# EAGLE board SD_Sniffer-Panel-v22 (EAGLE 6.5.0)
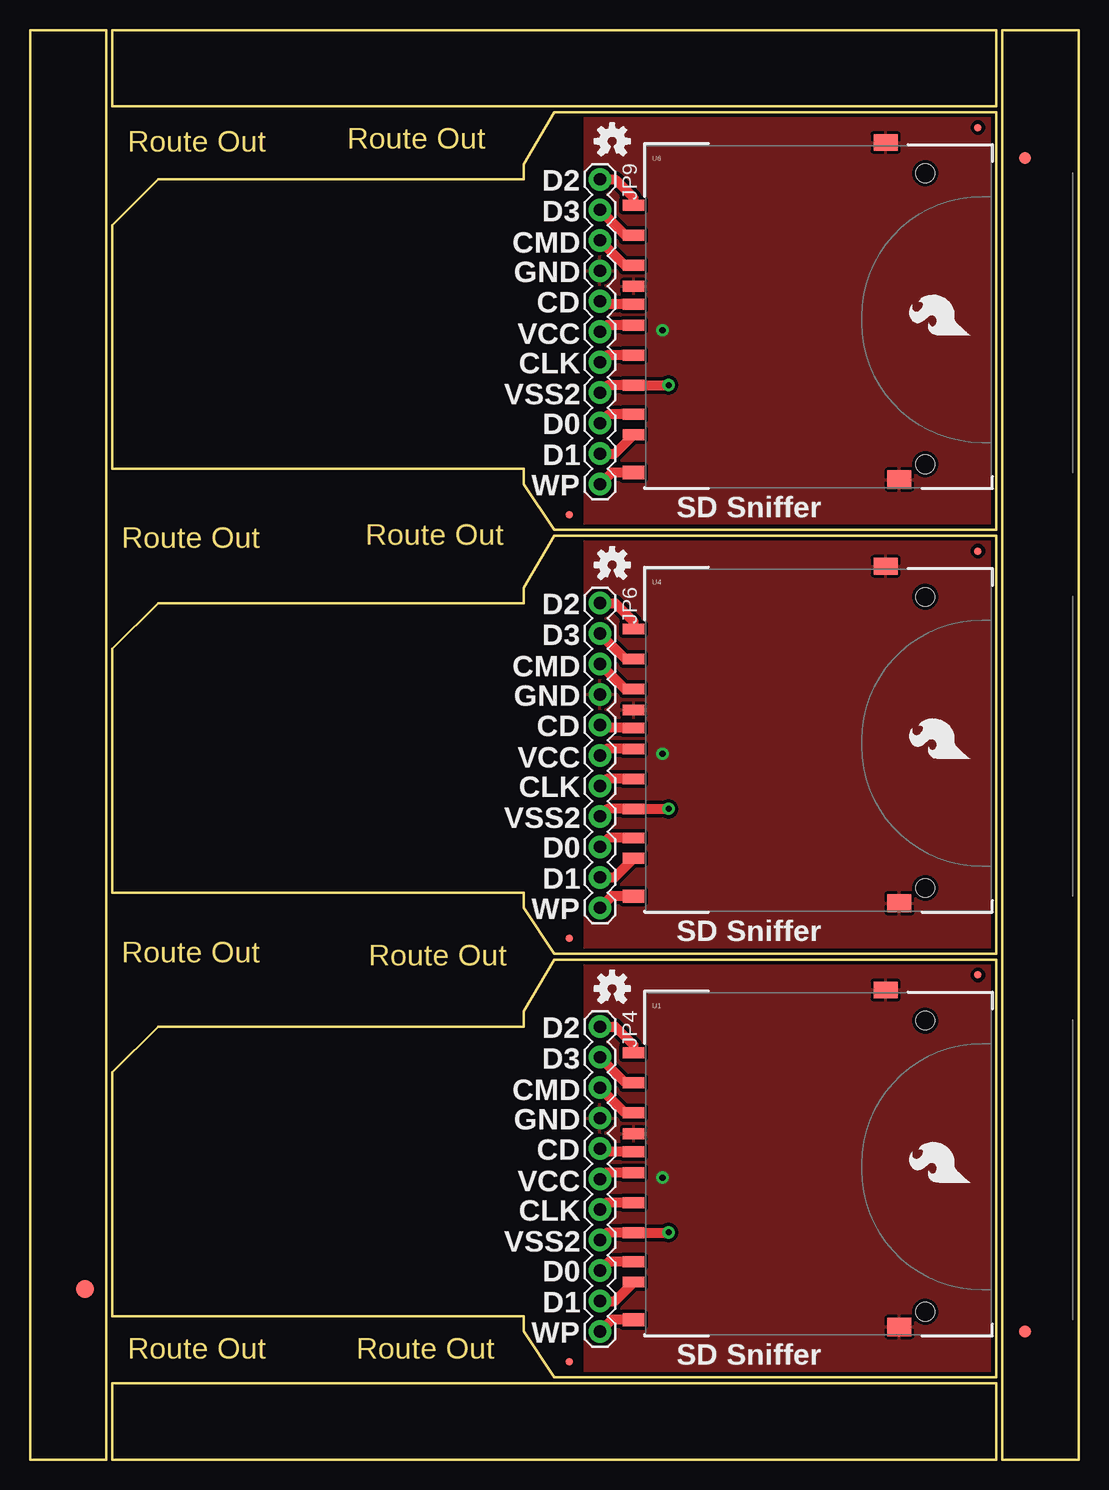
[diagram p0: board, top side]
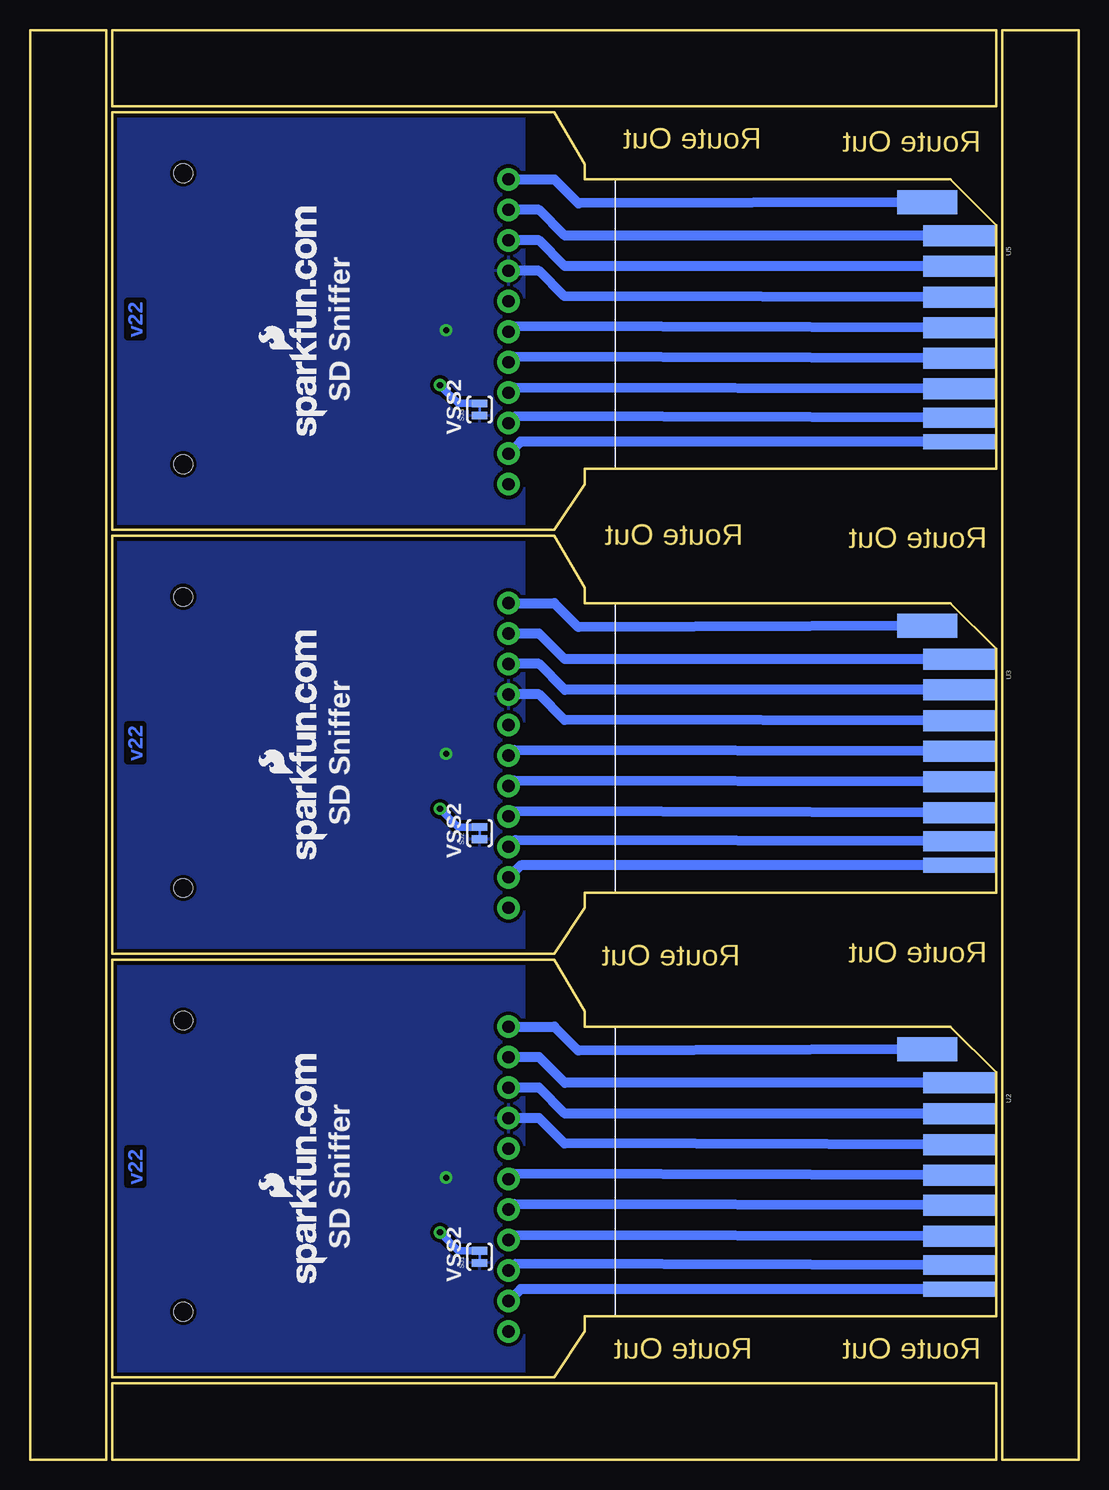
[diagram p1: board, bottom side, seen from below]

Size 87.38 x 119.13 mm. Coordinates in mm from the lower left corner, seen from the top.
Outline: 8.13,6.35 80.52,6.35 80.52,0 57.66,0
Outline: 8.13,119.13 80.52,119.13 80.52,112.78 57.66,112.78
Outline: 79.5,112.78 6.86,112.78 6.86,119.13 29.97,119.13
Outline: 79.25,0 6.86,0 6.86,6.35 29.72,6.35
Outline: 80.52,6.86 80.52,41.66 43.69,41.66 41.15,37.34 41.15,36.07 10.67,36.07 6.86,32.26 6.86,11.94 41.15,11.94 41.15,10.67 43.69,6.86 80.52,6.86
Outline: 80.52,42.16 80.52,76.96 43.69,76.96 41.15,72.64 41.15,71.37 10.67,71.37 6.86,67.56 6.86,47.24 41.15,47.24 41.15,45.97 43.69,42.16 80.52,42.16
Outline: 80.52,77.47 80.52,112.27 43.69,112.27 41.15,107.95 41.15,106.68 10.67,106.68 6.86,102.87 6.86,82.55 41.15,82.55 41.15,81.28 43.69,77.47 80.52,77.47
Outline: 87.38,0 87.38,119.13 81.03,119.13 81.03,0 87.38,0
Outline: 6.35,0 6.35,119.13 0,119.13 0,0 6.35,0
Copper layers (1*16): Top 0.035mm / dielectric 1.5mm / Bottom 0.035mm
Design rules "SparkFun-2-layer": minimum track width 7mil, minimum drill 15mil, track to track 8mil, track to pad 8mil, pad to pad 8mil, via to via 8mil, smd to smd 8mil, copper to edge 8mil, drill to drill 8mil, minimum pad ring 12mil, minimum via ring 10mil, stop-mask expansion 4mil, vias tented up to drill 20mil, thermal gap 10mil

## Footprints (pad centres in the part's own frame; a part is rotated, then mirrored left to right if it is on the bottom)
FIDUCIAL-1.5X3 = smd 1.5 x 1.5: 1 0,0
FIDUCIAL-1X2 = smd 1 x 1: 1 0,0
MICRO-FIDUCIAL = smd 0.635 x 0.635: 1 0,0
1X11 = drill 1.016 pad 1.88: 1 0,0; 2 2.54,0; 3 5.08,0; 4 7.62,0; 5 10.16,0; 6 12.7,0; 7 15.24,0; 8 17.78,0; 9 20.32,0; 10 22.86,0; 11 25.4,0
SJ_2S-TRACE = smd 0.635 x 1.27: 1 -0.508,0; 2 0.508,0
SD_1:1 = smd 1.8 x 0.9: 1 -1,6.77; 2 -1,4.27; 3 -1,2.52; 4 -1,-0.73; 5 -1,-3.23; 6 -1,-5.73; 7 -1,-8.15; 8 -1,-9.85; 9 -1,9.27; CD -1,1.02 | smd 2 x 1.4: SH@1 20,14.496 | smd 2 x 1.527: SH@2 21.15,-13.589 | smd 1.8 x 1.1: WP -1,-13 | hole 1.55: 23.3,11.94; 23.3,-12.32
SD-MMC-CARD = smd 1.75 x 6: 1 -6.745,14.713; 2 -4.195,14.703; 3 -1.6,14.703; 4 0.93,14.703; 5 3.465,14.703; 6 6.03,14.703 | smd 1.65 x 6: 7 8.43,14.703 | smd 1.25 x 6: 8 10.43,14.703 | smd 2 x 5: 9 -9.53,12.03

## Placement (x,y rotation side)
E$1  [FIDUCIAL-1.5X3]  4.57,14.22 0 top
E$2  [FIDUCIAL-1X2]  82.93,10.67 0 top
E$3  [FIDUCIAL-1X2]  82.93,108.46 180 top
JP1  FIDUCIALUFIDUCIAL  [MICRO-FIDUCIAL]  78.99,75.69 0 top
JP2  FIDUCIALUFIDUCIAL  [MICRO-FIDUCIAL]  78.99,40.39 0 top
JP3  FIDUCIALUFIDUCIAL  [MICRO-FIDUCIAL]  44.96,8.13 0 top
JP4  M11PTH  [1X11]  47.5,36.07 270 top
JP5  FIDUCIALUFIDUCIAL  [MICRO-FIDUCIAL]  44.96,43.43 0 top
JP6  M11PTH  [1X11]  47.5,71.37 270 top
JP7  FIDUCIALUFIDUCIAL  [MICRO-FIDUCIAL]  78.99,111 0 top
JP8  FIDUCIALUFIDUCIAL  [MICRO-FIDUCIAL]  44.96,78.74 0 top
JP9  M11PTH  [1X11]  47.5,106.68 270 top
LOGO  LOGO-SFENEW  [SFE-NEW-WEBLOGO]  62.61,14.73 90 bottom
LOGO1  LOGO-SFENEW  [SFE-NEW-WEBLOGO]  62.61,50.04 90 bottom
LOGO2  LOGO-SFENEW  [SFE-NEW-WEBLOGO]  62.61,85.34 90 bottom
SJ1  SOLDERJUMPERTRACE  [SJ_2S-TRACE]  49.91,16.89 90 bottom
SJ2  SOLDERJUMPERTRACE  [SJ_2S-TRACE]  49.91,52.2 90 bottom
SJ3  SOLDERJUMPERTRACE  [SJ_2S-TRACE]  49.91,87.5 90 bottom
U1  SD_CARD_SOCKET  [SD_1:1]  51.31,24.64 0 top
U2  SD_MMC_CARDSD_PCB  [SD-MMC-CARD]  24.64,24.64 270 bottom
U3  SD_MMC_CARDSD_PCB  [SD-MMC-CARD]  24.64,59.94 270 bottom
U4  SD_CARD_SOCKET  [SD_1:1]  51.31,59.94 0 top
U5  SD_MMC_CARDSD_PCB  [SD-MMC-CARD]  24.64,95.25 270 bottom
U6  SD_CARD_SOCKET  [SD_1:1]  51.31,95.25 0 top
U$1  SFE_LOGO_FLAME.2_INCH  [SFE_LOGO_FLAME_.2]  78.61,58.04 90 top
U$2  OSHW-LOGOS  [OSHW-LOGO-S]  48.51,39.24 0 top
U$3  OSHW-LOGOS  [OSHW-LOGO-S]  48.51,74.55 0 top
U$4  SFE_LOGO_FLAME.2_INCH  [SFE_LOGO_FLAME_.2]  78.61,22.73 90 top
U$5  SFE_LOGO_FLAME.2_INCH  [SFE_LOGO_FLAME_.2]  78.61,93.34 90 top
U$6  OSHW-LOGOS  [OSHW-LOGO-S]  48.51,109.86 0 top

## Library data of the parts
E$1 = SparkFun-Retired
E$2 E$3 U$1-U$6 = SparkFun-Aesthetics
JP1-JP3 JP5 JP7 JP8 LOGO LOGO1 LOGO2 = SparkFun
JP4 JP6 JP9 U1 U4 U6 = SparkFun-Connectors
SJ1-SJ3 = SparkFun-Passives
U2 U3 U5 = SparkFun-Boards

## Nets
CD: JP4.5 U1.CD
CD1: JP6.5 U4.CD
CD2: JP9.5 U6.CD
CLK: JP4.7 U1.5 U2.5
CLK1: JP6.7 U3.5 U4.5
CLK2: JP9.7 U5.5 U6.5
CMD: JP4.3 U1.2 U2.2
CMD1: JP6.3 U3.2 U4.2
CMD2: JP9.3 U5.2 U6.2
D0: JP4.9 U1.7 U2.7
D1: JP4.10 U1.8 U2.8
D2: JP4.1 U1.9 U2.9
D3: JP4.2 U1.1 U2.1
D4: JP6.1 U3.9 U4.9
D5: JP6.9 U3.7 U4.7
D6: JP6.10 U3.8 U4.8
D7: JP6.2 U3.1 U4.1
D8: JP9.1 U5.9 U6.9
D9: JP9.9 U5.7 U6.7
D10: JP9.10 U5.8 U6.8
D11: JP9.2 U5.1 U6.1
GND: JP4.4 SJ1.1 U1.3 U1.SH@1 U1.SH@2 U2.3
GND1: JP6.4 SJ2.1 U3.3 U4.3 U4.SH@1 U4.SH@2
GND2: JP9.4 SJ3.1 U5.3 U6.3 U6.SH@1 U6.SH@2
VCC: JP4.6 U1.4 U2.4
VCC1: JP6.6 U3.4 U4.4
VCC2: JP9.6 U5.4 U6.4
VSS1: JP6.8 SJ2.2 U3.6 U4.6
VSS2: JP4.8 SJ1.2 U1.6 U2.6
VSS3: JP9.8 SJ3.2 U5.6 U6.6
WP: JP4.11 U1.WP
WP1: JP6.11 U4.WP
WP2: JP9.11 U6.WP

## Tracks (layer width: path | path; a pad name or v marks a point on that pad's centre or on a via)
CD
  Top 0.813: U1.CD 47.75,25.66 JP4.5
CD1
  Top 0.813: U4.CD 47.75,60.96 JP6.5
CD2
  Top 0.813: U6.CD 47.75,96.27 JP9.5
CLK
  Top 0.813: U1.5 48.08,21.41 JP4.7
  Bottom 0.813: U2.5 47.05,21.27 JP4.7
CLK1
  Top 0.813: U4.5 48.08,56.71 JP6.7
  Bottom 0.813: U3.5 47.05,56.58 JP6.7
CLK2
  Top 0.813: U6.5 48.08,92.02 JP9.7
  Bottom 0.813: U5.5 47.05,91.89 JP9.7
CMD
  Top 0.813: U1.2 49.58,28.91 JP4.3
  Bottom 0.813: U2.2 42.8,28.83 44.96,30.99 JP4.3
CMD1
  Top 0.813: U4.2 49.58,64.21 JP6.3
  Bottom 0.813: U3.2 42.8,64.14 44.96,66.29 JP6.3
CMD2
  Top 0.813: U6.2 49.58,99.52 JP9.3
  Bottom 0.813: U5.2 42.8,99.44 44.96,101.6 JP9.3
D0
  Top 0.813: U1.7 48.24,16.49 JP4.9
  Bottom 0.813: U2.7 46.94,16.31 JP4.9
D1
  Top 0.813: JP4.10 48.73,13.21 U1.8
  Bottom 0.813: U2.8 46.5,14.21 JP4.10
D2
  Top 0.813: JP4.1 48.77,36.07 50.31,34.53 U1.9
  Bottom 0.813: JP4.1 43.69,36.07 41.69,34.07 U2.9
D3
  Top 0.813: U1.1 49.62,31.41 JP4.2
  Bottom 0.813: U2.1 42.81,31.38 44.96,33.53 JP4.2
D4
  Top 0.813: JP6.1 48.77,71.37 50.31,69.83 U4.9
  Bottom 0.813: JP6.1 43.69,71.37 41.69,69.37 U3.9
D5
  Top 0.813: U4.7 48.24,51.79 JP6.9
  Bottom 0.813: U3.7 46.94,51.61 JP6.9
D6
  Top 0.813: JP6.10 48.73,48.51 U4.8
  Bottom 0.813: U3.8 46.5,49.51 JP6.10
D7
  Top 0.813: U4.1 49.62,66.71 JP6.2
  Bottom 0.813: U3.1 42.81,66.69 44.96,68.83 JP6.2
D8
  Top 0.813: JP9.1 48.77,106.68 50.31,105.14 U6.9
  Bottom 0.813: JP9.1 43.69,106.68 41.69,104.68 U5.9
D9
  Top 0.813: U6.7 48.24,87.1 JP9.9
  Bottom 0.813: U5.7 46.94,86.92 JP9.9
D10
  Top 0.813: JP9.10 48.73,83.82 U6.8
  Bottom 0.813: U5.8 46.5,84.82 JP9.10
D11
  Top 0.813: U6.1 49.62,102.02 JP9.2
  Bottom 0.813: U5.1 42.81,102 44.96,104.14 JP9.2
GND  (via drill 0.51)
  Bottom 0.813: U2.3 42.85,26.34 44.96,28.45 JP4.4
  other vias: 52.7,23.5
  pour Top (isolate 0.305): 46.23,41.66 46.23,6.86 80.52,6.86 80.52,41.66
  pour Bottom (isolate 0.305): 46.23,41.66 46.23,6.86 80.52,6.86 80.52,41.66
GND1  (via drill 0.51)
  Bottom 0.813: U3.3 42.85,61.64 44.96,63.75 JP6.4
  other vias: 52.7,58.8
  pour Top (isolate 0.305): 46.23,76.96 46.23,42.16 80.52,42.16 80.52,76.96
  pour Bottom (isolate 0.305): 46.23,76.96 46.23,42.16 80.52,42.16 80.52,76.96
GND2  (via drill 0.51)
  Bottom 0.813: U5.3 42.85,96.95 44.96,99.06 JP9.4
  other vias: 52.7,94.11
  pour Top (isolate 0.305): 46.23,112.27 46.23,77.47 80.52,77.47 80.52,112.27
  pour Bottom (isolate 0.305): 46.23,112.27 46.23,77.47 80.52,77.47 80.52,112.27
VCC
  Top 0.813: U1.4 48.04,23.91 JP4.6
  Bottom 0.813: U2.4 47.06,23.81 JP4.6
VCC1
  Top 0.813: U4.4 48.04,59.21 JP6.6
  Bottom 0.813: U3.4 47.06,59.11 JP6.6
VCC2
  Top 0.813: U6.4 48.04,94.52 JP9.6
  Bottom 0.813: U5.4 47.06,94.42 JP9.6
VSS1  (via drill 0.51)
  Top 0.813: JP6.8 48.12,54.21 U4.6 53.2,54.21 v53.21,54.23
  Bottom 0.61: SJ2.2 51.69,52.7 v53.21,54.23
  Bottom 0.813: U3.6 47.08,54.01 JP6.8
VSS2  (via drill 0.51)
  Top 0.813: JP4.8 48.12,18.91 U1.6 53.2,18.91 v53.21,18.92
  Bottom 0.61: SJ1.2 51.69,17.4 v53.21,18.92
  Bottom 0.813: U2.6 47.08,18.71 JP4.8
VSS3  (via drill 0.51)
  Top 0.813: JP9.8 48.12,89.52 U6.6 53.2,89.52 v53.21,89.53
  Bottom 0.61: SJ3.2 51.69,88.01 v53.21,89.53
  Bottom 0.813: U5.6 47.08,89.32 JP9.8
WP
  Top 0.813: U1.WP 48.47,11.64 JP4.11
WP1
  Top 0.813: U4.WP 48.47,46.94 JP6.11
WP2
  Top 0.813: U6.WP 48.47,82.25 JP9.11

## Text on the board
Bottom: v22 | v22 | v22
Dimension: Route Out | Route Out | Route Out | Route Out | Route Out | Route Out | Route Out | Route Out
tPlace: D2 | D3 | CMD | GND | CD | VCC | CLK | VSS2 | D0 | D1 | WP | SD Sniffer | D2 | D3 | CMD | GND | CD | VCC | CLK | VSS2 | D0 | D1 | WP | SD Sniffer | D2 | D3 | CMD | GND | CD | VCC | CLK | VSS2 | D0 | D1 | WP | SD Sniffer
bPlace: VSS2 | SD Sniffer | VSS2 | SD Sniffer | VSS2 | SD Sniffer